# EAGLE board netconx1_v02 (EAGLE 6.5.0)
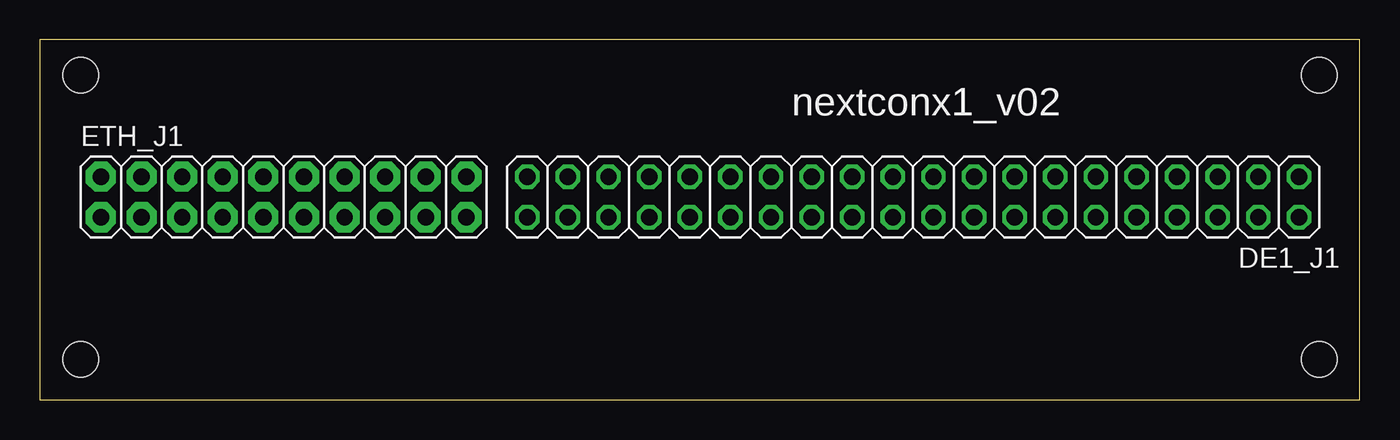
[diagram p0: board, top side]
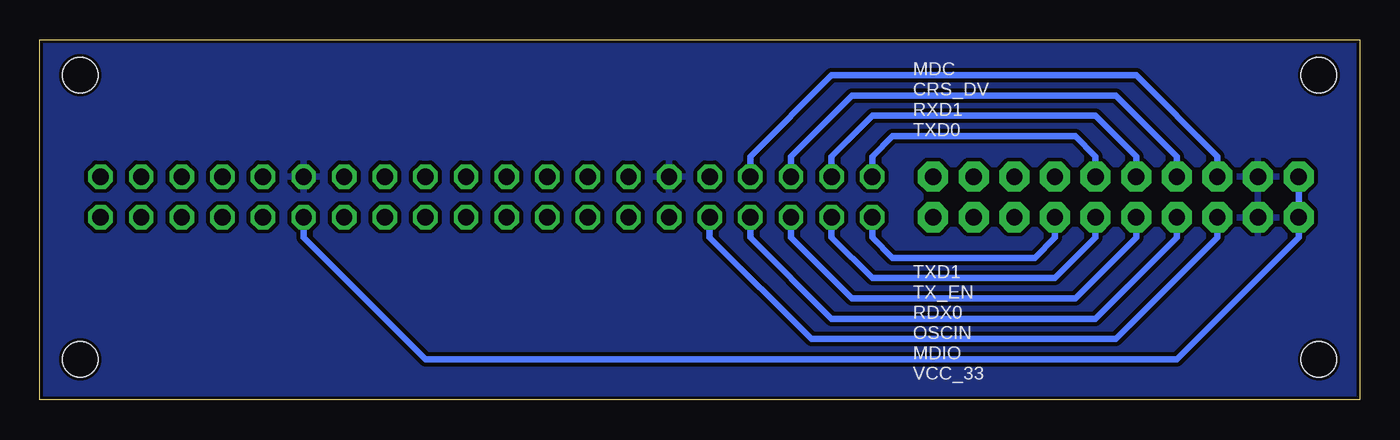
[diagram p1: board, bottom side, seen from below]

Size 82.53 x 22.53 mm. Coordinates in mm from the lower left corner, seen from the top.
Outline: 0,0 82.53,0 82.53,22.53 0,22.53 0,0
Copper layers (1*16): Top 0.035mm / dielectric 1.5mm / Bottom 0.035mm
Design rules "SparkFun-2-layer-STANDARD": minimum track width 10mil, minimum drill 20mil, track to track 10mil, track to pad 8mil, pad to pad 8mil, via to via 10mil, smd to smd 8mil, copper to edge 8mil, drill to drill 8mil, minimum pad ring 10mil, minimum via ring 10mil, stop-mask expansion 4mil, vias tented up to drill 20mil, thermal gap 10mil
Holes 2.2 mm at 2.54,20.32 2.54,2.54 80.01,2.54 80.01,20.32

## Footprints (pad centres in the part's own frame; a part is rotated, then mirrored left to right if it is on the bottom)
2X20 = drill 1.016 octagon: 1 -24.13,-1.27; 2 -24.13,1.27; 3 -21.59,-1.27; 4 -21.59,1.27; 5 -19.05,-1.27; 6 -19.05,1.27; 7 -16.51,-1.27; 8 -16.51,1.27; 9 -13.97,-1.27; 10 -13.97,1.27; 11 -11.43,-1.27; 12 -11.43,1.27; 13 -8.89,-1.27; 14 -8.89,1.27; 15 -6.35,-1.27; 16 -6.35,1.27; 17 -3.81,-1.27; 18 -3.81,1.27; 19 -1.27,-1.27; 20 -1.27,1.27; 21 1.27,-1.27; 22 1.27,1.27; 23 3.81,-1.27; 24 3.81,1.27; 25 6.35,-1.27; 26 6.35,1.27; 27 8.89,-1.27; 28 8.89,1.27; 29 11.43,-1.27; 30 11.43,1.27; 31 13.97,-1.27; 32 13.97,1.27; 33 16.51,-1.27; 34 16.51,1.27; 35 19.05,-1.27; 36 19.05,1.27; 37 21.59,-1.27; 38 21.59,1.27; 39 24.13,-1.27; 40 24.13,1.27
2X10 = drill 1.016 pad 1.88 octagon: 1 -11.43,-1.27; 2 -11.43,1.27; 3 -8.89,-1.27; 4 -8.89,1.27; 5 -6.35,-1.27; 6 -6.35,1.27; 7 -3.81,-1.27; 8 -3.81,1.27; 9 -1.27,-1.27; 10 -1.27,1.27; 11 1.27,-1.27; 12 1.27,1.27; 13 3.81,-1.27; 14 3.81,1.27; 15 6.35,-1.27; 16 6.35,1.27; 17 8.89,-1.27; 18 8.89,1.27; 19 11.43,-1.27; 20 11.43,1.27

## Placement (x,y rotation side)
DE1_J1  [2X20]  54.61,12.7 0 top
ETH_J1  [2X10]  15.24,12.7 0 top

## Library data of the parts
DE1_J1 ETH_J1 = connectors

## Nets
GND: DE1_J1.12 DE1_J1.30 ETH_J1.3 ETH_J1.4
N$1: DE1_J1.1 ETH_J1.13
N$2: DE1_J1.3 ETH_J1.11
N$3: DE1_J1.5 ETH_J1.9
N$4: DE1_J1.7 ETH_J1.7
N$5: DE1_J1.9 ETH_J1.5
N$6: DE1_J1.2 ETH_J1.12
N$7: DE1_J1.4 ETH_J1.10
N$8: DE1_J1.6 ETH_J1.8
N$9: DE1_J1.8 ETH_J1.6
VCC: DE1_J1.29 ETH_J1.1 ETH_J1.2
VCC5: DE1_J1.11

## Tracks (layer width: path | path; a pad name or v marks a point on that pad's centre or on a via)
GND
  pour Bottom: 0,22.86 0,0 82.55,0 82.55,22.86
N$1
  Bottom 0.406: ETH_J1.13 19.05,10.16 20.32,8.89 29.21,8.89 30.48,10.16 DE1_J1.1
N$2
  Bottom 0.406: ETH_J1.11 16.51,10.16 19.05,7.62 30.48,7.62 33.02,10.16 DE1_J1.3
N$3
  Bottom 0.406: ETH_J1.9 13.97,10.16 17.78,6.35 31.75,6.35 35.56,10.16 DE1_J1.5
N$4
  Bottom 0.406: ETH_J1.7 11.43,10.16 16.51,5.08 33.02,5.08 38.1,10.16 DE1_J1.7
N$5
  Bottom 0.406: ETH_J1.5 8.89,10.16 15.24,3.81 34.29,3.81 40.64,10.16 DE1_J1.9
N$6
  Bottom 0.406: ETH_J1.12 16.51,15.24 17.78,16.51 29.21,16.51 30.48,15.24 DE1_J1.2
N$7
  Bottom 0.406: ETH_J1.10 13.97,15.24 16.51,17.78 30.48,17.78 33.02,15.24 DE1_J1.4
N$8
  Bottom 0.406: ETH_J1.8 11.43,15.24 15.24,19.05 31.75,19.05 35.56,15.24 DE1_J1.6
N$9
  Bottom 0.406: ETH_J1.6 8.89,15.24 13.97,20.32 33.02,20.32 38.1,15.24 DE1_J1.8
VCC
  Bottom 0.406: ETH_J1.2 ETH_J1.1 3.81,10.16 11.43,2.54 58.42,2.54 66.04,10.16 DE1_J1.29

## Text on the board
tPlace: nextconx1_v02
bPlace: MDC | CRS_DV | RXD1 | TXD0 | TXD1 | TX_EN | RDX0 | OSCIN | MDIO | VCC_33